# EAGLE board TAG_connect-iso (EAGLE 6.3)
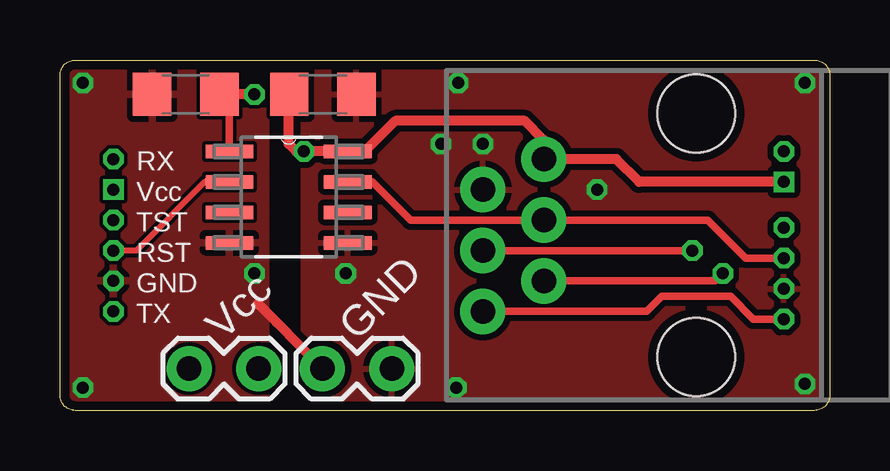
[diagram p0: board, top side]
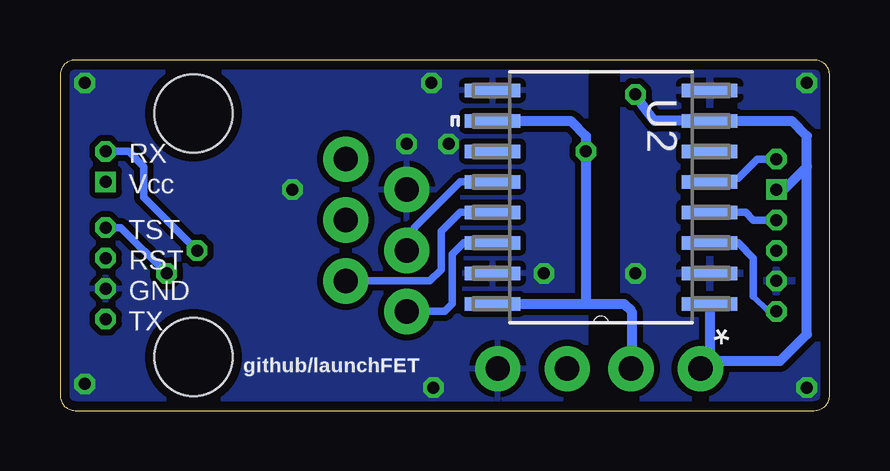
[diagram p1: board, bottom side, seen from below]

Size 32.07 x 14.61 mm. Coordinates in mm from the lower left corner, seen from the top.
Outline: 32.07,13.97 32.07,0.64 arc-90 31.43,0 0.64,0 arc-90 0,0.64 0,13.97 arc-90 0.64,14.61 31.43,14.61 arc-90 32.07,13.97
Copper layers (1*16): Top 0.0356mm / dielectric 1.5011mm / Bottom 0.0356mm
Design rules "LaenPCBOrder *": minimum track width 6mil, minimum drill 13mil, track to track 6mil, track to pad 6mil, pad to pad 6mil, via to via 6mil, smd to smd 6mil, copper to edge 15mil, drill to drill 6mil, minimum pad ring 7mil, minimum via ring 7mil, stop-mask expansion 4mil, vias tented up to drill 20mil, thermal gap 10mil

## Footprints (pad centres in the part's own frame; a part is rotated, then mirrored left to right if it is on the bottom)
C1206 = smd 1.6 x 1.8: 1 -1.4,0; 2 1.4,0
RJ11-6 = drill 1.016 pad 1.88: 1 1.905,8.89; 2 3.175,6.35; 3 4.445,8.89; 4 5.715,6.35; 5 6.985,8.89; 6 8.255,6.35 | hole 3.251: 0,0; 10.16,0
1X02_LOCK = drill 1.016 pad 1.88: 1 -0.178,0; 2 2.718,0
DW16 = smd 2.311 x 0.559: 1 -4.521,4.445; 2 -4.521,3.175; 3 -4.521,1.905; 4 -4.521,0.635; 5 -4.521,-0.635; 6 -4.521,-1.905; 7 -4.521,-3.175; 8 -4.521,-4.445; 9 4.521,-4.445; 10 4.521,-3.175; 11 4.521,-1.905; 12 4.521,-0.635; 13 4.521,0.635; 14 4.521,1.905; 15 4.521,3.175; 16 4.521,4.445
D8 = smd 1.981 x 0.559: 1 -2.464,1.905; 2 -2.464,0.635; 3 -2.464,-0.635; 4 -2.464,-1.905; 5 2.464,-1.905; 6 2.464,-0.635; 7 2.464,0.635; 8 2.464,1.905
EASYMSP-6PIN = drill 0.5 octagon: GND 0,-1.27; RST 0,0; RX 0,3.81; TST 0,1.27; TX 0,-2.54 | drill 0.5 square: VCC 0,2.54
SAFEMSP-6PIN = drill 0.5 octagon: GND 0,-1.27; RST 0,0; RX 0,4.445; TST 0,1.27; TX 0,-2.54 | drill 0.5 square: VCC 0,3.175

## Placement (x,y rotation side)
C1  [C1206]  10.95,13.18 0 top
C2  [C1206]  5.24,13.18 180 top
J2  RJ11-6PTH  [RJ11-6]  26.51,2.22 90 top
JP1  [1X02_LOCK]  5.56,1.75 0 top
JP2  [1X02_LOCK]  13.65,1.75 180 top
U2  ISO7231C_DW_16  [DW16]  9.52,8.89 180 bottom
U$2  ISO1540  [D8]  9.52,8.89 0 top
U$4  6-PIN-ICSPEASY-MSP  [EASYMSP-6PIN]  2.22,6.67 0 top
U$5  6-PIN-ICSPSAFE-MSP  [SAFEMSP-6PIN]  30.16,6.35 0 bottom

## Library data of the parts
C1 C2 = adafruit
J2 = SparkFun-Connectors
JP1 JP2 = SparkFun-Passives
U2 = TI; DATASHEETURL: http://www.ti.com/lit/gpn/ISO7231C; DESCRIPTION: Triple Channel, 2/1, 25Mbps, Digital Isolator; FAMILY_NAME: ISOLATOR; GENERIC_PART_NUMBER: ISO7231C; INDUSTRY_STD_PKG_TYPE: SOIC; MANUFACTURER: Texas Instruments; MANUFACTURER_PART_NUMBER: iso7231c_dw_16; PACKAGE_DESIGNATOR: DW; PIN_COUNT: 16; VENDOR: Texas Instruments
U$2 = TI
U$4 U$5 = LaunchFET

## Nets
GND_FET: C2.2 JP2.2 U2.2 U2.8 U$2.4 U$4.GND
GND_TARGET: C1.2 J2.5 JP2.1 U2.9 U2.15 U$2.5 U$5.GND
RESET_FET: U$2.2 U$4.RST
RESET_TARGET: J2.4 U$2.7 U$5.RST
RX_FET: U2.5 U$4.RX
RX_TARGET: J2.3 U2.12 U$5.RX
TEST_FET: U2.4 U$4.TST
TEST_TARGET: J2.2 U2.13 U$5.TST
TX_FET: U2.3 U$4.TX
TX_TARGET: J2.1 U2.14 U$5.TX
VCC_FET: C2.1 JP1.1 U2.1 U2.7 U$2.1 U$4.VCC
VCC_TARGET: C1.1 J2.6 JP1.2 U2.10 U2.16 U$2.8 U$5.VCC

## Tracks (layer width: path | path; a pad name or v marks a point on that pad's centre or on a via)
GND_FET  (via drill 0.5)
  Top 0.406: JP2.2 9.03,3.67 8.25,4.45
  other vias: 0.95,0.95 0.95,13.65 8.1,5.71
  pour Top: 8.57,0 0,0 0,14.61 8.57,14.61
  pour Bottom (isolate 0.254): 0,14.61 8.57,14.61 8.57,0 0,0
GND_TARGET  (via drill 0.5)
  other vias: 11.91,5.71 17.62,11.11 15.88,11.11 31.04,13.65 31.04,1.11 16.59,13.65 16.51,0.95 22.38,9.21
  pour Top (isolate 0.254): 10.16,14.29 31.75,14.29 31.75,0.32 10.16,0.32
  pour Bottom (isolate 0.254): 10.16,14.29 31.75,14.29 31.75,0.32 10.16,0.32
RESET_FET
  Top 0.254: U$2.2 6.03,9.53 3.17,6.67 U$4.RST
RESET_TARGET
  Top 0.305: U$2.7 13.02,9.53 14.61,7.94 J2.4 26.99,7.94 28.57,6.35 U$5.RST
RX_FET
  Bottom 0.305: U2.5 4.85,9.68 3.81,9.68 3.02,10.48 U$4.RX
RX_TARGET  (via drill 0.5)
  Top 0.305: J2.3 v26.35,6.67
  Bottom 0.305: J2.3 17.3,6.99 17.3,7.62 15.4,9.53 U2.12 | v26.35,6.67 28.57,8.89 28.57,10.16 29.21,10.79 U$5.RX
TEST_FET
  Bottom 0.305: U2.4 3.49,8.25 3.17,7.94 U$4.TST
TEST_TARGET  (via drill 0.5)
  Top 0.305: J2.2 27.3,5.4 v27.62,5.71
  Bottom 0.305: U2.13 15.4,8.25 16.19,7.46 16.19,5.87 16.67,5.4 J2.2 | v27.62,5.71 29.53,7.62 U$5.TST
TX_FET
  Bottom 0.254: 2.54,4.13 3.17,4.76
  Bottom 0.305: 3.17,4.76 3.17,6.35 3.81,6.99 U2.3 | U$4.TX 2.54,4.13
TX_TARGET
  Top 0.305: J2.1 24.45,4.13 25.08,4.76 27.94,4.76 28.89,3.81 U$5.TX
  Bottom 0.305: U2.14 15.24,6.99 15.72,6.51 15.72,4.45 16.03,4.13 J2.1
VCC_FET  (via drill 0.5)
  Top 0.305: U$2.1 7.06,12.75 C2.1
  Top 0.406: v8.1,13.18 C2.1
  Bottom 0.305: U2.1 5,2.12 | 5,2.15 4.92,2.06
  Bottom 0.406: 0.95,10.16 1.9,9.21 U$4.VCC | 0.95,10.16 0.95,11.43 1.59,12.07 U2.7 7.3,12.07 7.78,12.7 v8.1,13.18 | 5,2.12 JP1.1 | U2.1 5,2.15 | 4.92,2.06 2.06,2.06 0.95,3.18 0.95,10.16
VCC_TARGET  (via drill 0.5)
  Top 0.406: C1.1 9.52,13.15 9.52,11.11 9.84,10.79 v10.16,10.79 U$2.8 12.7,10.79 13.97,12.07 19.37,12.07 20.16,11.27 J2.6 23.18,10.48 24.13,9.53 U$5.VCC
  Bottom 0.406: U2.16 10.16,4.45 | 10.16,4.45 8.57,4.45 8.25,4.13 8.25,1.77 JP1.2 | U2.10 10.79,12.07 10.16,11.43 v10.16,10.79 10.16,4.45

## Text on the board
tStop: LaunchFET
_tsilk: Vcc | GND
_bsilk: github/launchFET